# Altium PCB sallenKeyHP.PcbDoc
Units mm, origin at the board's own origin, x right, y up, seen from the top; angles counter-clockwise.
Board outline 100 x 100 mm, 2 copper layers (Top Layer, Bottom Layer); 99 components, 53 nets, 224 pads, 2 vias.
Unrouted connection lines stored in the file: 52.
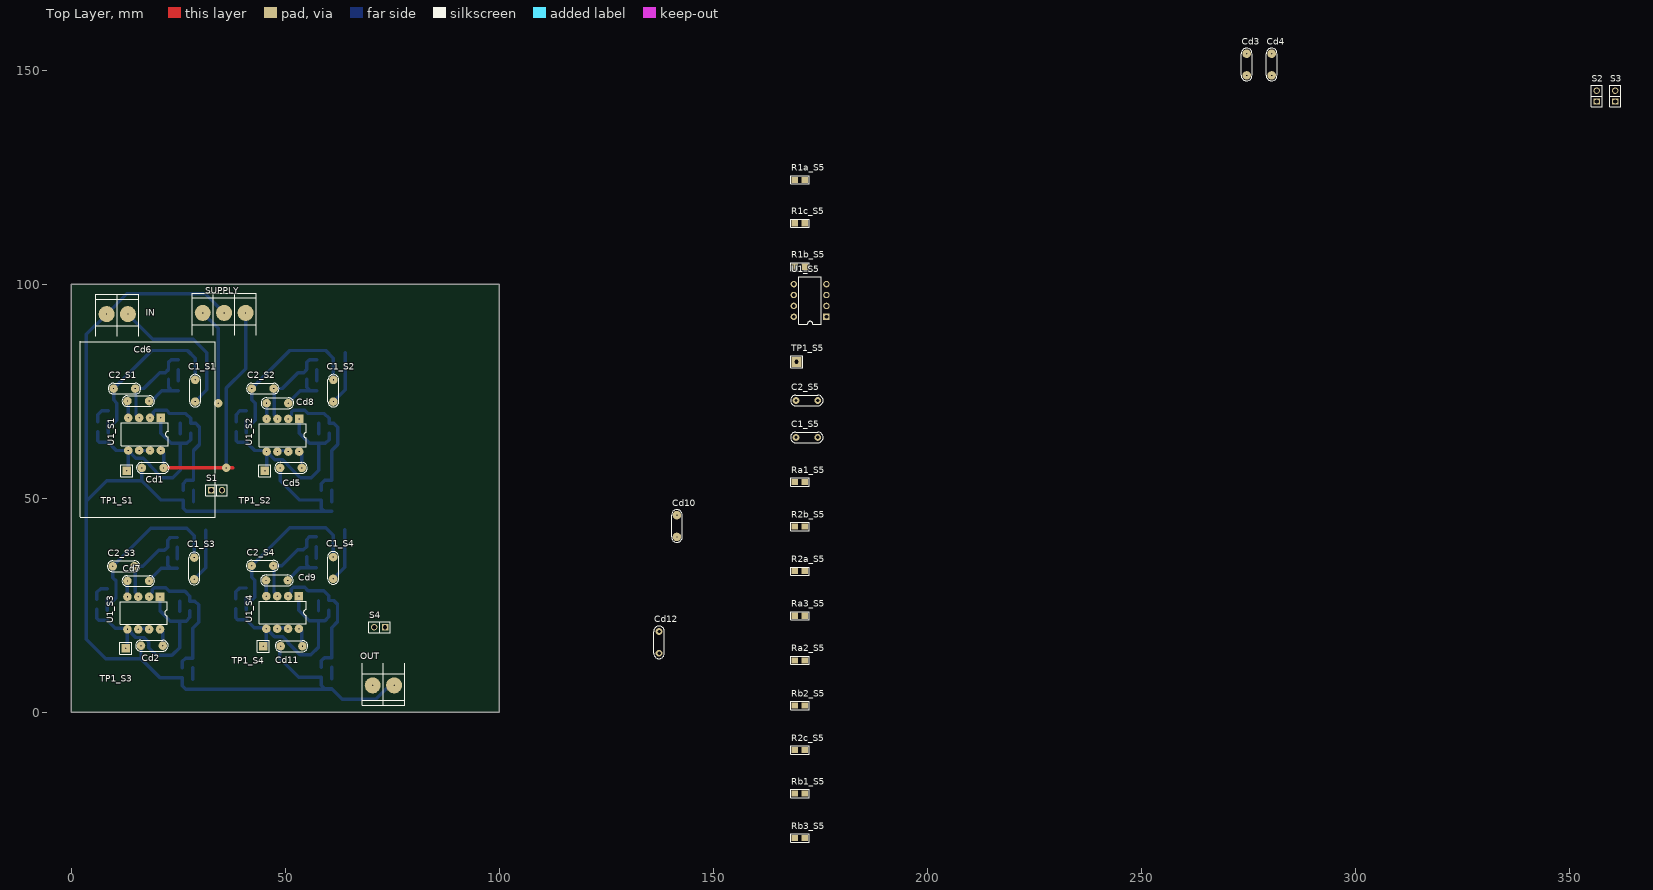
[diagram p0: Top Layer view]
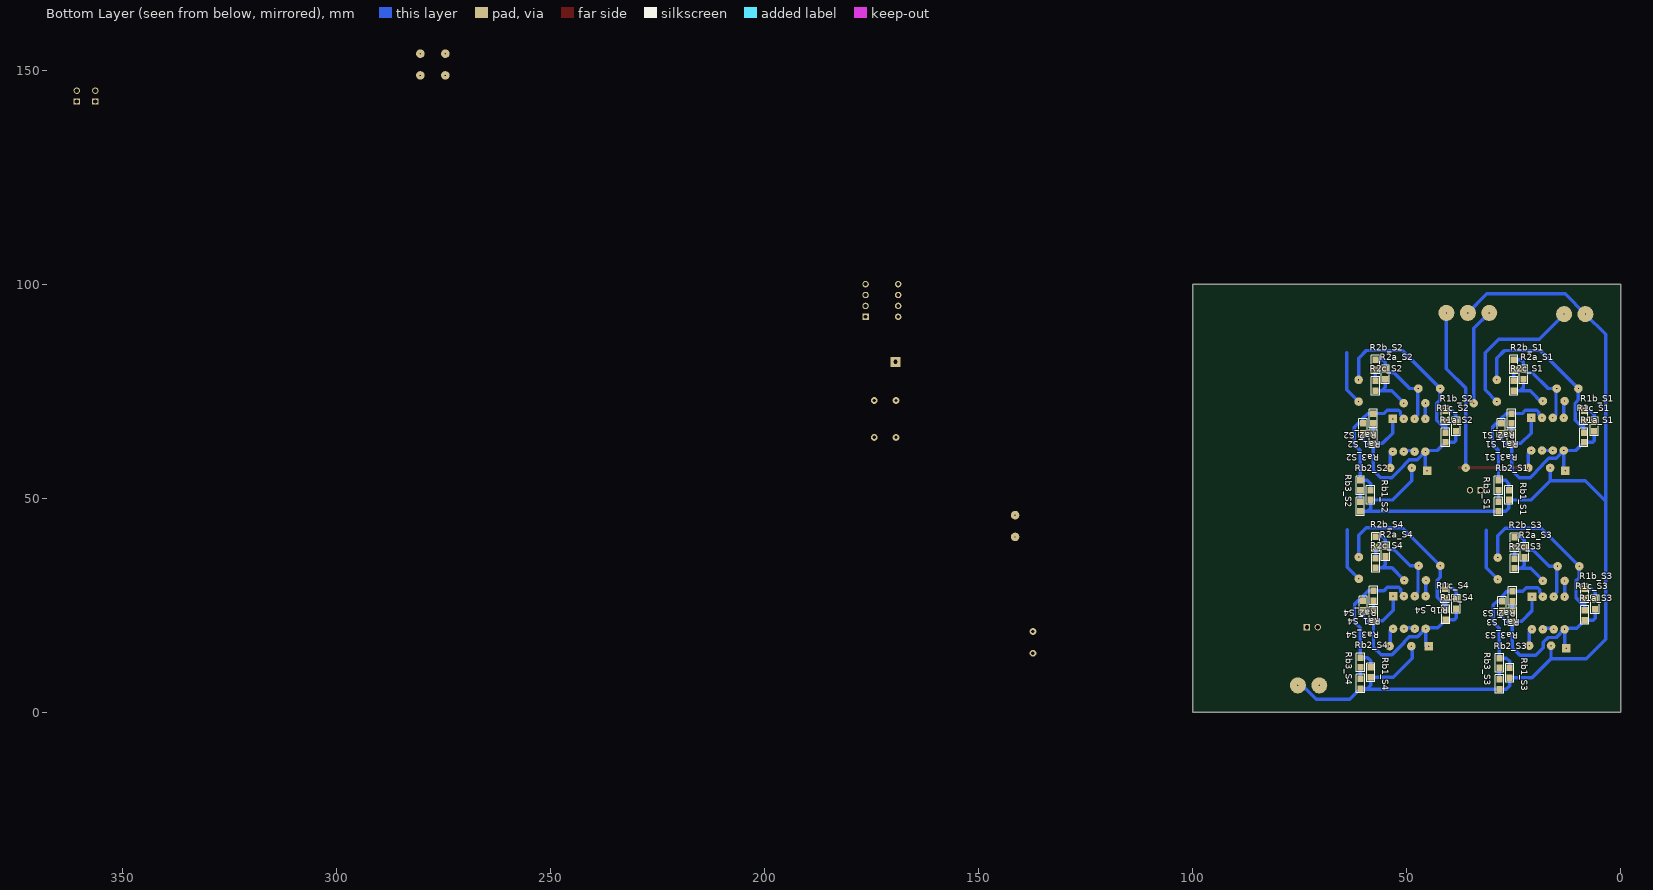
[diagram p1: Bottom Layer view, seen from below]

## Layer stack, top to bottom
Top Solder: solder mask 0.0102, Solder Resist, Dk 3.5
Top Layer: signal copper 0.0356
Dielectric 1: dielectric 0.32, FR-4, Dk 4.8
Bottom Layer: signal copper 0.0356
Bottom Solder: solder mask 0.0102, Solder Resist, Dk 3.5

## Board outline
100,0 100,100 0,100 0,0

## Design rules (kind name [scope] priority, off if disabled: settings)
Clearance [All] p1: gap=0.4 ignorepadtopadclearanceinfootprint=FALSE
PolygonConnect [All] p1: connectstyle=Relief reliefconductorwidth=0.254 reliefentries=4 polygonreliefangle="90 Angle" airgapwidth=0.254
RoomDefinition S1 [InComponentClass('S1')] p1: confinementstyle=ConfineIn formatcopy=TRUE lockcomponents=FALSE outline 33.782,45.466 33.782,86.487 2.413,86.487 2.413,45.466
RoomDefinition S2 [InComponentClass('S2')] p2: confinementstyle=ConfineIn formatcopy=TRUE lockcomponents=FALSE outline 66.093,45.466 66.093,86.487 34.724,86.487 34.724,45.466
RoomDefinition finalFilter [InComponentClass('finalFilter')] p3: confinementstyle=ConfineIn formatcopy=TRUE lockcomponents=FALSE outline 0,0 50.8,0 50.8,25.4 0,25.4
RoomDefinition S5 [InComponentClass('S5')] p4: confinementstyle=ConfineIn formatcopy=TRUE lockcomponents=FALSE outline 177.419,0 177.419,163.068 164.973,163.068 164.973,0
RoomDefinition S4 [InComponentClass('S4')] p5: confinementstyle=ConfineIn formatcopy=TRUE lockcomponents=FALSE outline 66.04,4.064 66.04,45.085 34.671,45.085 34.671,4.064
RoomDefinition S3 [InComponentClass('S3')] p6: confinementstyle=ConfineIn formatcopy=TRUE lockcomponents=FALSE outline 33.581,3.937 33.581,44.958 2.212,44.958 2.212,3.937
RoutingVias [All] p1: holewidth=0.3 width=2 viastyle="Through Hole" minholewidth=0.3 minwidth=2 maxholewidth=0.3 maxwidth=2
SolderMaskExpansion [All] p1: expansion=0.102
Width [All] p1: maxlimit=0.9 minlimit=0.7 preferedwidth=0.8
30 further rules are at their usual default settings.

## Classes and differential pairs
component class "Stage 5": "C1_Stage 5" "C2_Stage 5" "R1a_Stage 5" "R1b_Stage 5" "R1c_Stage 5" "R2a_Stage 5" "R2b_Stage 5" "R2c_Stage 5" "Ra1_Stage 5" "Ra2_Stage 5" "Ra3_Stage 5" "Rb1_Stage 5" "Rb2_Stage 5" "Rb3_Stage 5" "TP1_Stage 5" "U1_Stage 5"
channel class filtroFinal: "Stage 1" "Stage 2" "Stage 3" "Stage 4"
component class "Stage 4": "C1_Stage 4" "C2_Stage 4" "R1a_Stage 4" "R1b_Stage 4" "R1c_Stage 4" "R2a_Stage 4" "R2b_Stage 4" "R2c_Stage 4" "Ra1_Stage 4" "Ra2_Stage 4" "Ra3_Stage 4" "Rb1_Stage 4" "Rb2_Stage 4" "Rb3_Stage 4" "TP1_Stage 4" "U1_Stage 4"
component class "Stage 3": "C1_Stage 3" "C2_Stage 3" "R1a_Stage 3" "R1b_Stage 3" "R1c_Stage 3" "R2a_Stage 3" "R2b_Stage 3" "R2c_Stage 3" "Ra1_Stage 3" "Ra2_Stage 3" "Ra3_Stage 3" "Rb1_Stage 3" "Rb2_Stage 3" "Rb3_Stage 3" "TP1_Stage 3" "U1_Stage 3"
component class "Stage 2": "C1_Stage 2" "C2_Stage 2" "R1a_Stage 2" "R1b_Stage 2" "R1c_Stage 2" "R2a_Stage 2" "R2b_Stage 2" "R2c_Stage 2" "Ra1_Stage 2" "Ra2_Stage 2" "Ra3_Stage 2" "Rb1_Stage 2" "Rb2_Stage 2" "Rb3_Stage 2" "TP1_Stage 2" "U1_Stage 2"
component class "Stage 1": "C1_Stage 1" "C2_Stage 1" "R1a_Stage 1" "R1b_Stage 1" "R1c_Stage 1" "R2a_Stage 1" "R2b_Stage 1" "R2c_Stage 1" "Ra1_Stage 1" "Ra2_Stage 1" "Ra3_Stage 1" "Rb1_Stage 1" "Rb2_Stage 1" "Rb3_Stage 1" "TP1_Stage 1" "U1_Stage 1"
component class finalFilter: Cd1 Cd2 Cd3 Cd4 Cd5 Cd6 Cd7 Cd8 Cd9 Cd10 Cd11 Cd12 IN OUT "Stage 1" "Stage 2" "Stage 3" "Stage 4" SUPPLY

## Components (designator, comment, footprint, x,y, rotation, side; value= is the part's Value field where it differs from the comment)
C1_S1 "CAP" CAP200#1 28.903,75.184 r90 top (schematic designator C1)
C1_S2 "CAP" CAP200#1 61.214,75.184 r90 top (schematic designator C1)
C1_S3 "CAP" CAP200#1 28.702,33.655 r90 top (schematic designator C1)
C1_S4 "CAP" CAP200#1 61.161,33.782 r90 top (schematic designator C1)
C1_S5 "CAP" CAP200#2 171.831,64.262 r180 top (schematic designator C1)
C2_S1 "CAP" CAP200#1 12.393,75.692 r0 top (schematic designator C2)
C2_S2 "CAP" CAP200#1 44.704,75.692 r0 top (schematic designator C2)
C2_S3 "CAP" CAP200#1 12.192,34.163 r0 top (schematic designator C2)
C2_S4 "CAP" CAP200#1 44.651,34.29 r0 top (schematic designator C2)
C2_S5 "CAP" CAP200#2 171.831,72.898 r180 top (schematic designator C2)
Cd1 "CAP" CAP200#1 18.997,57.15 r180 top
Cd2 "CAP" CAP200#1 18.796,15.621 r180 top
Cd3 "CAP" CAP200#1 274.574,151.384 r90 top
Cd4 "CAP" CAP200#1 280.416,151.384 r90 top
Cd5 "CAP" CAP200#1 51.308,57.15 r180 top
Cd6 "CAP" CAP200#1 15.621,72.771 r0 top
Cd7 "CAP" CAP200#1 15.621,30.734 r0 top
Cd8 "CAP" CAP200#1 48.133,72.263 r0 top
Cd9 "CAP" CAP200#1 48.006,30.861 r0 top
Cd10 "CAP" CAP200#1 141.478,43.561 r90 top
Cd11 "CAP" CAP200#1 51.435,15.494 r180 top
Cd12 "CAP" CAP200#2 137.287,16.383 r90 top
IN "BORNERA 2" BORNERA2 10.708,93.091 r270 top
OUT "BORNERA 2" BORNERA2 72.898,6.35 r90 top
R1a_S1 "RES" 0805 8.583,64.262 r90 bottom (schematic designator R1a)
R1a_S2 "RES" 0805 40.894,64.262 r90 bottom (schematic designator R1a)
R1a_S3 "RES" 0805 8.382,22.733 r90 bottom (schematic designator R1a)
R1a_S4 "RES" 0805 40.841,22.86 r90 bottom (schematic designator R1a)
R1a_S5 "RES" 0805 170.18,124.46 r180 top (schematic designator R1a)
R1b_S1 "RES" 0805 8.583,69.342 r270 bottom (schematic designator R1b)
R1b_S2 "RES" 0805 40.894,69.342 r270 bottom (schematic designator R1b)
R1b_S3 "RES" 0805 8.382,27.813 r270 bottom (schematic designator R1b)
R1b_S4 "RES" 0805 41.021,27.813 r270 bottom (schematic designator R1b)
R1b_S5 "RES" 0805 170.18,104.14 r180 top (schematic designator R1b)
R1c_S1 "RES" 0805 6.17,66.802 r90 bottom (schematic designator R1c)
R1c_S2 "RES" 0805 38.481,66.802 r90 bottom (schematic designator R1c)
R1c_S3 "RES" 0805 5.969,25.273 r90 bottom (schematic designator R1c)
R1c_S4 "RES" 0805 38.428,25.4 r90 bottom (schematic designator R1c)
R1c_S5 "RES" 0805 170.18,114.3 r180 top (schematic designator R1c)
R2a_S1 "RES" 0805 22.68,78.994 r90 bottom (schematic designator R2a)
R2a_S2 "RES" 0805 54.991,78.994 r90 bottom (schematic designator R2a)
R2a_S3 "RES" 0805 22.479,37.465 r90 bottom (schematic designator R2a)
R2a_S4 "RES" 0805 54.938,37.592 r90 bottom (schematic designator R2a)
R2a_S5 "RES" 0805 170.18,33.02 r180 top (schematic designator R2a)
R2b_S1 "RES" 0805 24.966,81.28 r90 bottom (schematic designator R2b)
R2b_S2 "RES" 0805 57.277,81.28 r90 bottom (schematic designator R2b)
R2b_S3 "RES" 0805 24.765,39.751 r90 bottom (schematic designator R2b)
R2b_S4 "RES" 0805 57.224,39.878 r90 bottom (schematic designator R2b)
R2b_S5 "RES" 0805 170.18,43.434 r180 top (schematic designator R2b)
R2c_S1 "RES" 0805 24.966,76.327 r90 bottom (schematic designator R2c)
R2c_S2 "RES" 0805 57.277,76.327 r90 bottom (schematic designator R2c)
R2c_S3 "RES" 0805 24.765,34.798 r90 bottom (schematic designator R2c)
R2c_S4 "RES" 0805 57.224,34.925 r90 bottom (schematic designator R2c)
R2c_S5 "RES" 0805 170.18,-8.763 r180 top (schematic designator R2c)
Ra1_S1 "RES" 0805 27.887,66.421 r90 bottom (schematic designator Ra1)
Ra1_S2 "RES" 0805 60.198,66.421 r90 bottom (schematic designator Ra1)
Ra1_S3 "RES" 0805 27.686,24.892 r90 bottom (schematic designator Ra1)
Ra1_S4 "RES" 0805 60.145,25.019 r90 bottom (schematic designator Ra1)
Ra1_S5 "RES" 0805 170.18,53.848 r180 top (schematic designator Ra1)
Ra2_S1 "RES" 0805 25.474,68.707 r90 bottom (schematic designator Ra2)
Ra2_S2 "RES" 0805 57.785,68.707 r90 bottom (schematic designator Ra2)
Ra2_S3 "RES" 0805 25.273,27.178 r90 bottom (schematic designator Ra2)
Ra2_S4 "RES" 0805 57.732,27.305 r90 bottom (schematic designator Ra2)
Ra2_S5 "RES" 0805 170.18,12.192 r180 top (schematic designator Ra2)
Ra3_S1 "RES" 0805 25.474,64.008 r90 bottom (schematic designator Ra3)
Ra3_S2 "RES" 0805 57.785,64.008 r90 bottom (schematic designator Ra3)
Ra3_S3 "RES" 0805 25.273,22.479 r90 bottom (schematic designator Ra3)
Ra3_S4 "RES" 0805 57.732,22.606 r90 bottom (schematic designator Ra3)
Ra3_S5 "RES" 0805 170.18,22.606 r180 top (schematic designator Ra3)
Rb1_S1 "RES" 0805 26.109,50.8 r90 bottom (schematic designator Rb1)
Rb1_S2 "RES" 0805 58.42,50.8 r90 bottom (schematic designator Rb1)
Rb1_S3 "RES" 0805 25.908,9.271 r90 bottom (schematic designator Rb1)
Rb1_S4 "RES" 0805 58.367,9.398 r90 bottom (schematic designator Rb1)
Rb1_S5 "RES" 0805 170.18,-18.923 r180 top (schematic designator Rb1)
Rb2_S1 "RES" 0805 28.522,53.086 r90 bottom (schematic designator Rb2)
Rb2_S2 "RES" 0805 60.833,53.086 r90 bottom (schematic designator Rb2)
Rb2_S3 "RES" 0805 28.321,11.557 r90 bottom (schematic designator Rb2)
Rb2_S4 "RES" 0805 60.78,11.684 r90 bottom (schematic designator Rb2)
Rb2_S5 "RES" 0805 170.18,1.651 r180 top (schematic designator Rb2)
Rb3_S1 "RES" 0805 28.522,48.133 r90 bottom (schematic designator Rb3)
Rb3_S2 "RES" 0805 60.833,48.133 r90 bottom (schematic designator Rb3)
Rb3_S3 "RES" 0805 28.321,6.604 r90 bottom (schematic designator Rb3)
Rb3_S4 "RES" 0805 60.78,6.731 r90 bottom (schematic designator Rb3)
Rb3_S5 "RES" 0805 170.18,-29.337 r180 top (schematic designator Rb3)
S1 "JUMPER" JUMPER2 33.909,51.943 r0 top
S2 "JUMPER" JUMPER2 356.362,144.018 r90 top
S3 "JUMPER" JUMPER2 360.68,144.018 r90 top
S4 "JUMPER" JUMPER2 72.009,19.939 r180 top
SUPPLY "BORNERA 3" BORNERA3 35.687,93.345 r270 top
TP1_S1 "TP" TPTH#1 12.901,56.515 r180 top (schematic designator TP1)
TP1_S2 "TP" TPTH#1 45.212,56.515 r180 top (schematic designator TP1)
TP1_S3 "TP" TPTH#1 12.7,14.986 r180 top (schematic designator TP1)
TP1_S4 "TP" TPTH#1 44.831,15.494 r90 top (schematic designator TP1)
TP1_S5 "TP" TPTH#2 169.418,81.915 r180 top (schematic designator TP1)
U1_S1 "TL082P" P008#1 17.092,65.024 r180 top (schematic designator U1)
U1_S2 "TL082P" P008#1 49.403,64.774 r180 top (schematic designator U1)
U1_S3 "TL082P" P008#1 16.891,23.245 r180 top (schematic designator U1)
U1_S4 "TL082P" P008#1 49.35,23.372 r180 top (schematic designator U1)
U1_S5 "TL082P" P008#2 172.593,96.266 r90 top (schematic designator U1)

## Footprints (in the part's own frame and the unit in brackets; to place one, negate y for a bottom-side part, rotate by r counter-clockwise, add the part's x,y. Pads: shape width x height; smd on the part's side, far side on the other; paste and mask are expansions set on the pad)
0805 [mil] "Pasivo 0805"
  rect 60x56 smd: 1(-45,0) 2(45,0)
  silkscreen extent -85,-38 85,38, body extent -40,-25 39,25, height 15
BORNERA2 [mm] "Bornera con Tornillos 5mm separación"
  round 3.75 hole 0.3: 1(0,2.5) 2(0,-2.5)
  silkscreen extent -4.6,-5 5.2,5, body extent -3.76,-4.89 3.94,5.61, height 10
BORNERA3 [mm] "Bornera con Tornillos 5mm separación"
  round 3.75 hole 0.3: 1(0,5) 2(0,0) 3(0,-5)
  silkscreen extent -4.6,-7.5 5.2,7.5, body extent -3.76,-7.39 3.94,8.11, height 10.05
CAP200#1 [mm]
  round 2 hole 0.3: 1(-2.54,0) 2(2.54,0)
  silkscreen extent -3.81,-1.27 3.81,1.27, body extent -2.79,-1.17 2.79,1.12, height 6.24
CAP200#2 [mm]
  round 1.575 hole 0.813: 1(-2.54,0) 2(2.54,0)
  silkscreen extent -3.81,-1.27 3.81,1.27, body extent -2.79,-1.17 2.79,1.12, height 6.24
JUMPER2 [mm]
  rect 1.5x1.5 hole 1.016: 1(-1.27,0)
  round 1.5 hole 1.016: 2(1.27,0)
  silkscreen extent -2.54,-1.27 2.54,1.27, body extent -2.46,-1.27 2.54,1.27, height 9.5
P008#1 [mm] "DIP; 8 Leads; Row Spacing 7.62 mm; Pitch 2.54 mm"
  rect 2x2 hole 0.3: 1(-3.81,-3.81)
  round 2 hole 0.3: 2(-1.27,-3.81) 3(1.27,-3.81) 4(3.81,-3.81) 5(3.81,3.81) 6(1.27,3.81) 7(-1.27,3.81) 8(-3.81,3.81)
  silkscreen extent -5.5,-2.65 5.5,2.65
P008#2 [mm] "DIP; 8 Leads; Row Spacing 7.62 mm; Pitch 2.54 mm"
  rect 1.5x1.5 hole 0.9: 1(-3.81,-3.81)
  round 1.5 hole 0.9: 2(-1.27,-3.81) 3(1.27,-3.81) 4(3.81,-3.81) 5(3.81,3.81) 6(1.27,3.81) 7(-1.27,3.81) 8(-3.81,3.81)
  silkscreen extent -5.5,-2.65 5.5,2.65
TPTH#1 [mm]
  rect 2x2 hole 0.3: 1(0,0)
  silkscreen extent -1.4,-1.4 1.4,1.4, body extent -1.27,-1.27 1.27,1.27, height 6.04
TPTH#2 [mm]
  rect 2.3x2.3 hole 1.016: 1(0,0)
  silkscreen extent -1.4,-1.4 1.4,1.4, body extent -1.27,-1.27 1.27,1.27, height 6.04

## Part data
U1_S1 U1_S2 U1_S3 U1_S4 U1_S5: "JFET-Input Operational Amplifier", Code_JEDEC=MO-001-AN, ComponentLink1Description="Manufacturer Link", ComponentLink1URL=http://www.ti.com/, ComponentLink2Description=Datasheet, ComponentLink2URL=http://www-s.ti.com/sc/ds/tl082.pdf, DatasheetVersion=Feb-1999, LatestRevisionDate=04-Mar-2005, LatestRevisionNote="Stylized 3D Model Added.", PackageDescription="DIP; 8 Leads; Row Spacing 7.62 mm; Pitch 2.54 mm", PackageReference=P008, PackageVersion=Jun-1999, Published=16-Jan-2001, Publisher="Altium Limited"

## Via types
v1: diameter 2, hole 0.3, Top Layer to Bottom Layer, 2 vias

## Nets (pads, with @x,y where several pads share a name; then routed paths per layer and width w, separated by ;. In a path a pad name is that pad's centre, name@x,y a point inside that pad or via, vN(x,y) a via of type N, cw(c..) or ccw(c..) an arc to the next point about the centre after c; other vN are vias at no path point)
GND: Cd1.2 Cd2.2 Cd3.2 Cd4.2 Cd5.2 Cd6.2 Cd7.2 Cd8.2 Cd9.2 Cd10.2 Cd11.2 Cd12.2 IN.2 OUT.2 R2a_S1.1 R2a_S2.1 R2a_S3.1 R2a_S4.1 R2a_S5.1 R2c_S1.1 R2c_S2.1 R2c_S3.1 R2c_S4.1 R2c_S5.1 Rb1_S1.1 Rb1_S2.1 Rb1_S3.1 Rb1_S4.1 Rb1_S5.1 Rb3_S1.1 Rb3_S2.1 Rb3_S3.1 Rb3_S4.1 Rb3_S5.1 SUPPLY.2 | length 338.7
  Bottom Layer w0.8: Cd2.2 16.256,12.573 ; Cd1.2 16.457,54.102 ; Cd7.2@18.161,30.861 20.955,33.655 23.241,33.655 ; Cd6.2@18.362,72.39 21.156,75.184 23.442,75.184 ; R2a_S3.1 22.479,34.417 23.241,33.655 ; R2a_S1.1 22.68,75.946 23.442,75.184 ; R2c_S3.1 23.241,33.655 ; R2c_S1.1 23.442,75.184 ; SUPPLY.2 31.242,97.79 12.907,97.79 IN.2 3.482,88.365 3.482,49.329 ; Cd11.2@48.715,15.748 48.715,12.7 53.16,8.255 Rb1_S4.1 58.367,6.35 59.129,5.588 Rb3_S4.1 ; Cd5.2 48.768,54.102 53.213,49.657 Rb1_S2.1 58.42,47.752 59.182,46.99 ; Cd9.2@50.62,30.988 53.414,33.782 55.7,33.782 ; Cd8.2@50.673,72.39 53.467,75.184 55.753,75.184 ; R2a_S4.1 54.938,34.544 55.7,33.782 ; R2a_S2.1 54.991,75.946 55.753,75.184 ; R2c_S4.1 55.7,33.782 ; R2c_S2.1 55.753,75.184 ; Rb3_S2.1 59.182,46.99 ; OUT.2 74.422,6.35 71.12,3.048 63.32,3.048 Rb3_S4.1 ; 3.482,49.329 8.255,54.102 16.457,54.102 ; 3.482,49.329 3.482,17.145 8.054,12.573 16.256,12.573 ; 16.256,12.573 20.701,8.128 Rb1_S3.1 25.908,6.223 26.67,5.461 Rb3_S3.1 60.653,5.461 Rb3_S4.1 ; 16.457,54.102 20.902,49.657 Rb1_S1.1 26.109,47.752 26.871,46.99 Rb3_S1.1 59.182,46.99
NetC1_S1_1: C1_S1.1 IN.1 | length 34.7
  Bottom Layer w0.8: IN.1 19.05,87.249 28.448,87.249 31.623,84.074 31.623,75.364 C1_S1.1
NetC1_S1_2: C1_S1.2 C2_S1.1 R1a_S1.2 R1b_S1.2 | length 41.6
  Bottom Layer w0.8: R1a_S1.2 8.583,66.929 ; R1b_S1.2 8.583,66.929 ; C1_S1.2 28.903,82.804 27.125,84.582 18.743,84.582 C2_S1.1 9.853,73.025 10.615,72.263 10.615,68.326 9.218,66.929 8.583,66.929
NetC1_S2_1: C1_S2.1 S1.2 | length 12.6
  Bottom Layer w0.8: C1_S2.1 63.934,75.364 63.934,84.074
NetC1_S2_2: C1_S2.2 C2_S2.1 R1a_S2.2 R1b_S2.2 | length 41.6
  Bottom Layer w0.8: R1a_S2.2 40.894,66.929 ; R1b_S2.2 40.894,66.929 ; C1_S2.2 61.214,82.804 59.436,84.582 51.054,84.582 C2_S2.1 42.164,73.025 42.926,72.263 42.926,68.326 41.529,66.929 40.894,66.929
NetC1_S3_1: C1_S3.1 S2.2 | length 12.6
  Bottom Layer w0.8: C1_S3.1 31.422,33.835 31.422,42.545
NetC1_S3_2: C1_S3.2 C2_S3.1 R1a_S3.2 R1b_S3.2 | length 41.6
  Bottom Layer w0.8: R1a_S3.2 8.382,25.4 ; R1b_S3.2 8.382,25.4 ; C1_S3.2 28.702,41.275 26.924,43.053 18.542,43.053 C2_S3.1 9.652,31.496 10.414,30.734 10.414,26.797 9.017,25.4 8.382,25.4
NetC1_S4_1: C1_S4.1 S3.2 | length 12.6
  Bottom Layer w0.8: C1_S4.1 63.881,33.962 63.881,42.672
NetC1_S4_2: C1_S4.2 C2_S4.1 R1a_S4.2 R1b_S4.2 | length 41.6
  Bottom Layer w0.8: R1a_S4.2 40.841,25.527 ; R1b_S4.2@40.841,26.797 40.841,25.527 ; C1_S4.2 61.161,41.402 59.383,43.18 51.001,43.18 C2_S4.1 42.111,31.623 42.873,30.861 42.873,26.924 41.476,25.527 40.841,25.527
NetC1_S5_1: C1_S5.1 S4.2
NetC1_S5_2: C1_S5.2 C2_S5.1 R1a_S5.2 R1b_S5.2
NetC2_S1_2: C2_S1.2 R2a_S1.2 R2b_S1.2 U1_S1.3 | length 21
  Bottom Layer w0.8: U1_S1.3 15.082,69.574 15.082,75.543 C2_S1.2 16.913,75.692 20.634,79.413 21.956,79.413 R2a_S1.2 22.68,81.788 23.315,82.423 R2b_S1.2
NetC2_S2_2: C2_S2.2 R2a_S2.2 R2b_S2.2 U1_S2.3 | length 21
  Bottom Layer w0.8: U1_S2.3@48.133,68.834 47.393,69.574 47.393,75.543 C2_S2.2 49.224,75.692 52.945,79.413 54.267,79.413 R2a_S2.2 54.991,81.788 55.626,82.423 R2b_S2.2
NetC2_S3_2: C2_S3.2 R2a_S3.2 R2b_S3.2 U1_S3.3 | length 21
  Bottom Layer w0.8: U1_S3.3@15.621,27.305 14.881,28.045 14.881,34.014 C2_S3.2 16.712,34.163 20.433,37.884 21.755,37.884 R2a_S3.2 22.479,40.259 23.114,40.894 R2b_S3.2
NetC2_S4_2: C2_S4.2 R2a_S4.2 R2b_S4.2 U1_S4.3 | length 21
  Bottom Layer w0.8: U1_S4.3@48.08,27.432 47.34,28.172 47.34,34.141 C2_S4.2 49.171,34.29 52.892,38.011 54.214,38.011 R2a_S4.2 54.938,40.386 55.573,41.021 R2b_S4.2
NetC2_S5_2: C2_S5.2 R2a_S5.2 R2b_S5.2 U1_S5.3
NetOUT_1: OUT.1 U1_S5.6 U1_S5.7
NetR1a_S1_1: R1a_S1.1 R1c_S1.1 Ra1_S1.1 Ra3_S1.1 TP1_S1.1 U1_S1.1 U1_S1.5 | length 50.4
  Bottom Layer w0.8: R1c_S1.1 6.17,63.5 6.551,63.119 R1a_S1.1 10.488,61.214 U1_S1.5 U1_S1.5@13.282,61.208 ; TP1_S1.1 13.282,56.896 U1_S1.5@13.282,61.208 ; U1_S1.1 20.902,65.278 23.315,62.865 Ra3_S1.1 ; Ra1_S1.1 27.887,63.754 26.998,62.865 Ra3_S1.1 ; U1_S1.5@13.282,61.208 15.076,59.414 16.738,59.414 18.257,57.896 18.257,57.763 21.156,54.864 23.696,54.864 25.474,56.642 Ra3_S1.1
NetR1a_S2_1: R1a_S2.1 R1c_S2.1 Ra1_S2.1 Ra3_S2.1 TP1_S2.1 U1_S2.1 U1_S2.5 | length 50.5
  Bottom Layer w0.8: R1c_S2.1 38.481,63.5 38.862,63.119 R1a_S2.1 42.799,61.214 45.593,61.214 U1_S2.5@45.593,61.208 ; TP1_S2.1 45.593,56.896 U1_S2.5 U1_S2.5@45.593,61.208 ; U1_S2.1@53.213,68.834 U1_S2.1 53.213,65.278 55.626,62.865 Ra3_S2.1 ; Ra1_S2.1 60.198,63.754 59.309,62.865 Ra3_S2.1 ; U1_S2.5@45.593,61.208 46.333,60.468 46.333,60.218 47.496,59.055 49.409,59.055 50.568,57.896 50.568,57.763 53.467,54.864 56.007,54.864 57.785,56.642 Ra3_S2.1
NetR1a_S3_1: R1a_S3.1 R1c_S3.1 Ra1_S3.1 Ra3_S3.1 TP1_S3.1 U1_S3.1 U1_S3.5 | length 51.2
  Bottom Layer w0.8: R1c_S3.1 5.969,21.971 6.35,21.59 R1a_S3.1 10.287,19.685 13.081,19.685 U1_S3.5@13.081,19.679 ; TP1_S3.1 13.081,15.367 U1_S3.5 U1_S3.5@13.081,19.679 ; U1_S3.1@20.701,27.305 U1_S3.1 20.701,23.749 23.114,21.336 Ra3_S3.1 ; Ra1_S3.1 27.686,22.225 26.797,21.336 Ra3_S3.1 ; U1_S3.5@13.081,19.679 13.821,18.939 13.821,18.689 14.984,17.526 16.897,17.526 18.056,16.367 18.056,15.091 19.812,13.335 23.495,13.335 25.273,15.113 Ra3_S3.1
NetR1a_S4_1: R1a_S4.1 R1c_S4.1 Ra1_S4.1 Ra3_S4.1 TP1_S4.1 U1_S4.1 U1_S4.5 | length 50.5
  Bottom Layer w0.8: R1c_S4.1 38.428,22.098 38.809,21.717 R1a_S4.1 42.746,19.812 45.54,19.812 U1_S4.5@45.54,19.806 ; TP1_S4.1@45.159,15.113 45.54,15.494 U1_S4.5 U1_S4.5@45.54,19.806 ; U1_S4.1@53.16,27.432 U1_S4.1 53.16,23.876 55.573,21.463 Ra3_S4.1 ; Ra1_S4.1 60.145,22.352 59.256,21.463 Ra3_S4.1 ; U1_S4.5@45.54,19.806 46.28,19.066 46.28,18.816 47.443,17.653 49.355,17.653 50.515,16.494 50.515,16.361 53.414,13.462 55.954,13.462 57.732,15.24 Ra3_S4.1
NetR1a_S5_1: R1a_S5.1 R1c_S5.1 Ra1_S5.1 Ra3_S5.1 TP1_S5.1 U1_S5.1 U1_S5.5
NetR1b_S1_1: R1b_S1.1 R1c_S1.2 | length 4.4
  Bottom Layer w0.8: R1c_S1.2 6.17,69.596 7.059,70.485 R1b_S1.1
NetR1b_S2_1: R1b_S2.1 R1c_S2.2 | length 4.4
  Bottom Layer w0.8: R1c_S2.2 38.481,69.596 39.37,70.485 R1b_S2.1
NetR1b_S3_1: R1b_S3.1 R1c_S3.2 | length 4.4
  Bottom Layer w0.8: R1c_S3.2 5.969,28.067 6.858,28.956 R1b_S3.1
NetR1b_S4_1: R1b_S4.1 R1c_S4.2 | length 4.4
  Bottom Layer w0.8: R1c_S4.2 38.428,28.194 39.317,29.083 R1b_S4.1@40.841,29.083
NetR1b_S5_1: R1b_S5.1 R1c_S5.2
NetR2b_S1_1: R2b_S1.1 R2c_S1.2 | length 2.7
  Bottom Layer w0.8: R2c_S1.2 R2b_S1.1
NetR2b_S2_1: R2b_S2.1 R2c_S2.2 | length 2.7
  Bottom Layer w0.8: R2c_S2.2 R2b_S2.1
NetR2b_S3_1: R2b_S3.1 R2c_S3.2 | length 2.7
  Bottom Layer w0.8: R2c_S3.2 R2b_S3.1
NetR2b_S4_1: R2b_S4.1 R2c_S4.2 | length 2.7
  Bottom Layer w0.8: R2c_S4.2 R2b_S4.1
NetR2b_S5_1: R2b_S5.1 R2c_S5.2
NetRa1_S1_2: Ra1_S1.2 Ra2_S1.2 Rb1_S1.2 Rb2_S1.2 U1_S1.2 | length 32.2
  Bottom Layer w0.8: U1_S1.2 19.102,69.574 19.102,70.165 19.57,70.634 22.233,70.634 23.017,69.85 Ra2_S1.2 26.744,69.85 27.887,68.707 Ra1_S1.2 29.03,67.564 29.919,66.675 29.919,62.611 28.522,61.214 Rb2_S1.2 26.871,54.229 26.109,53.467 Rb1_S1.2
NetRa1_S2_2: Ra1_S2.2 Ra2_S2.2 Rb1_S2.2 Rb2_S2.2 U1_S2.2 | length 32.2
  Bottom Layer w0.8: U1_S2.2@50.673,68.834 51.413,69.574 51.413,70.165 51.882,70.634 54.544,70.634 55.328,69.85 Ra2_S2.2 59.055,69.85 60.198,68.707 Ra1_S2.2 61.341,67.564 62.23,66.675 62.23,62.611 60.833,61.214 Rb2_S2.2 59.182,54.229 58.42,53.467 Rb1_S2.2
NetRa1_S3_2: Ra1_S3.2 Ra2_S3.2 Rb1_S3.2 Rb2_S3.2 U1_S3.2 | length 32.2
  Bottom Layer w0.8: U1_S3.2@18.161,27.305 18.901,28.045 18.901,28.636 19.37,29.105 22.032,29.105 22.816,28.321 Ra2_S3.2 26.543,28.321 27.686,27.178 Ra1_S3.2 28.829,26.035 29.718,25.146 29.718,21.082 28.321,19.685 Rb2_S3.2 26.67,12.7 25.908,11.938 Rb1_S3.2
NetRa1_S4_2: Ra1_S4.2 Ra2_S4.2 Rb1_S4.2 Rb2_S4.2 U1_S4.2 | length 32.2
  Bottom Layer w0.8: U1_S4.2@50.62,27.432 51.36,28.172 51.36,28.763 51.828,29.232 54.491,29.232 55.275,28.448 Ra2_S4.2 59.002,28.448 60.145,27.305 Ra1_S4.2 61.288,26.162 62.177,25.273 62.177,21.209 60.78,19.812 Rb2_S4.2 59.129,12.827 58.367,12.065 Rb1_S4.2
NetRa1_S5_2: Ra1_S5.2 Ra2_S5.2 Rb1_S5.2 Rb2_S5.2 U1_S5.2
NetRa2_S1_1: Ra2_S1.1 Ra3_S1.2 | length 2.4
  Bottom Layer w0.8: Ra3_S1.2 Ra2_S1.1
NetRa2_S2_1: Ra2_S2.1 Ra3_S2.2 | length 2.4
  Bottom Layer w0.8: Ra3_S2.2 Ra2_S2.1
NetRa2_S3_1: Ra2_S3.1 Ra3_S3.2 | length 2.4
  Bottom Layer w0.8: Ra3_S3.2 Ra2_S3.1
NetRa2_S4_1: Ra2_S4.1 Ra3_S4.2 | length 2.4
  Bottom Layer w0.8: Ra3_S4.2 Ra2_S4.1
NetRa2_S5_1: Ra2_S5.1 Ra3_S5.2
NetRb2_S1_1: Rb2_S1.1 Rb3_S1.2 | length 2.7
  Bottom Layer w0.8: Rb3_S1.2 Rb2_S1.1
NetRb2_S2_1: Rb2_S2.1 Rb3_S2.2 | length 2.7
  Bottom Layer w0.8: Rb3_S2.2 Rb2_S2.1
NetRb2_S3_1: Rb2_S3.1 Rb3_S3.2 | length 2.7
  Bottom Layer w0.8: Rb3_S3.2 Rb2_S3.1
NetRb2_S4_1: Rb2_S4.1 Rb3_S4.2 | length 2.7
  Bottom Layer w0.8: Rb3_S4.2 Rb2_S4.1
NetRb2_S5_1: Rb2_S5.1 Rb3_S5.2
NetS1_1: S1.1 U1_S1.6 U1_S1.7 | length 2.5
  Bottom Layer w0.8: U1_S1.6 U1_S1.7
NetS2_1: S2.1 U1_S2.6 U1_S2.7 | length 2.5
  Bottom Layer w0.8: U1_S2.6@48.133,61.214 U1_S2.7@50.673,61.214
NetS3_1: S3.1 U1_S3.6 U1_S3.7 | length 2.5
  Bottom Layer w0.8: U1_S3.6@15.621,19.685 U1_S3.7@18.161,19.685
NetS4_1: S4.1 U1_S4.6 U1_S4.7 | length 2.5
  Bottom Layer w0.8: U1_S4.6@48.08,19.812 U1_S4.7@50.62,19.812
VCC: Cd1.1 Cd2.1 Cd3.1 Cd4.1 Cd5.1 Cd11.1 SUPPLY.1 U1_S1.8 U1_S2.8 U1_S3.8 U1_S4.8 U1_S5.8 | length 71.5
  Top Layer w0.8: Cd1.1 37.719,57.15
  Bottom Layer w0.8: U1_S3.8@20.701,19.685 21.336,19.05 Cd2.1 ; U1_S1.8 21.537,60.579 Cd1.1 ; v1(36.195,57.15) 36.195,75.819 40.687,80.311 SUPPLY.1 ; U1_S4.8@53.16,19.812 53.795,19.177 Cd11.1@53.795,15.748 ; U1_S2.8@53.213,61.214 53.848,60.579 Cd5.1
VEE: Cd6.1 Cd7.1 Cd8.1 Cd9.1 Cd10.1 Cd12.1 SUPPLY.3 U1_S1.4 U1_S2.4 U1_S3.4 U1_S4.4 U1_S5.4 | length 36.8
  Bottom Layer w0.8: U1_S3.4@13.081,27.305 Cd7.1 Cd7.1@13.081,30.861 ; U1_S1.4 Cd6.1@13.282,72.39 ; SUPPLY.3 34.29,89.742 v1(34.29,72.263) ; U1_S4.4@45.54,27.432 Cd9.1@45.54,30.988 ; U1_S2.4@45.593,68.834 Cd8.1 Cd8.1@45.593,72.39

## Silkscreen, mask and mechanical layers (free items; w line width, h text height)
Top Overlay:
  lines w0.254: 2.032,45.593 33.655,45.593 33.655,86.614 2.032,86.614 ; 2.032,45.72 2.032,48.284 2.032,53.411 2.032,55.975 2.032,76.486 2.032,86.741